# EAGLE board Tiva_Xbee (EAGLE 9.4.0)
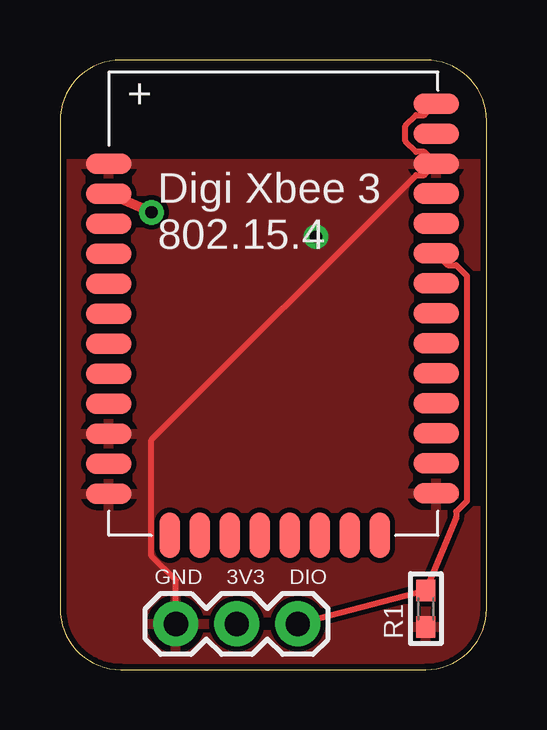
[diagram p0: board, top side]
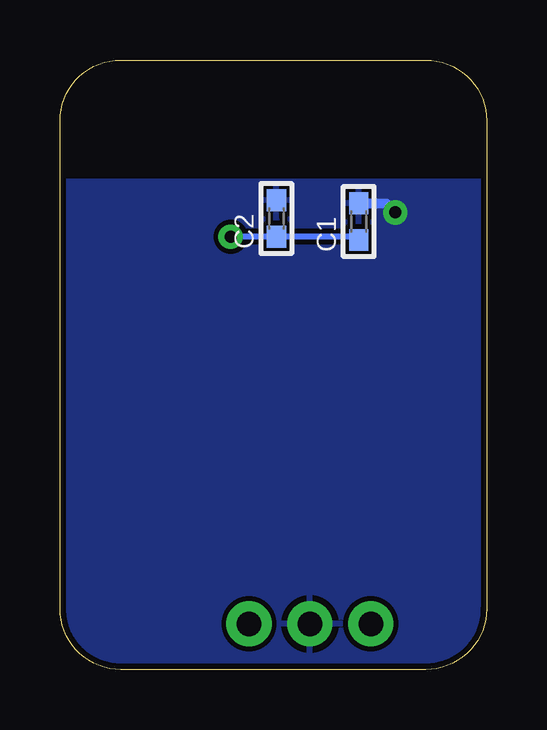
[diagram p1: board, bottom side, seen from below]

Size 17.78 x 25.4 mm. Coordinates in mm from the lower left corner, seen from the top.
Outline: 0,22.86 0,2.54 arc90 2.54,0 15.24,0 arc90 17.78,2.54 17.78,22.86 arc90 15.24,25.4 2.54,25.4 arc90 0,22.86
Copper layers (1*16): Top 0.035mm / dielectric 1.5mm / Bottom 0.035mm
Design rules "SparkFun": minimum track width 8mil, minimum drill 20mil, track to track 8mil, track to pad 8mil, pad to pad 8mil, via to via 8mil, smd to smd 8mil, copper to edge 10mil, drill to drill 8mil, minimum pad ring 12mil, minimum via ring 10mil, stop-mask expansion 4mil, vias tented up to drill 25mil, thermal gap 10mil

## Footprints (pad centres in the part's own frame; a part is rotated, then mirrored left to right if it is on the bottom)
_0603 = smd 0.9 x 0.8: 1 -0.762,0; 2 0.762,0
1X03 = drill 1.016 pad 1.88: 1 0,0; 2 2.54,0; 3 5.08,0
XBEE3_MICRO = smd 0.864 x 1.905: [RESERVED1] 0.681,-9.652; [RESERVED2] 1.93,-9.652; [RESERVED3] 3.18,-9.652; [RESERVED4] 4.43,-9.652; SPI_CLK/DIO18 -4.318,-9.652; SPI_MOSI/DIO15 -0.569,-9.652; SPI_MOSI/DIO16 -1.819,-9.652; SPI_SSEL/DIO17 -3.068,-9.652 | smd 1.905 x 0.864: [RESERVED5] 6.782,-6.65; AD0/DIO0 6.782,4.597; AD1/DIO1 6.782,3.348; AD2/DIO2 6.782,2.098; AD3/DIO3 6.782,0.848; ASSOCIATE/DIO5 6.782,-1.651; CTS/DIO7 6.782,-4.15; DIN/CONFIG/DIO14 -6.858,2.093; DIO4 6.782,-5.4; DIO12 -6.858,0.843; DOUT/DIO13 -6.858,3.343; DTR/SLEEP_RQ/DIO8 -6.858,-4.155; GND1 -6.858,5.842; GND2 -6.858,-5.405; GND3 -6.858,-7.904; GND4 6.782,-7.899; GND5 6.782,5.847; GND6 6.782,8.346; ON/SLEEP/DIO9 6.782,-2.901; PWM1/DIO11 -6.858,-2.906; RF 6.782,7.097; RSSI_PWM/DIO10 -6.858,-1.656; RST -6.858,-0.406; RTS/DIO6 6.782,-0.401; SPI_ATTN/BOOTMODE/DIO19 -6.858,-6.655; VCC -6.858,4.592

## Placement (x,y rotation side)
C1  9pF  [_0603]  5.33,18.67 90 bottom
C2  1uF  [_0603]  8.76,18.8 90 bottom
J1  [1X03]  9.91,1.91 180 top
R1  [_0603]  15.24,2.54 90 top
U$1  XBEE3_DIO  [XBEE3_MICRO]  8.89,15.24 0 top

## Library data of the parts
C1 C2 J1 R1 U$1 = CabelBot

## Nets
3.3V: C1.2 C2.2 J1.2 U$1.VCC
CTS: U$1.CTS/DIO7
DIN: U$1.DIN/CONFIG/DIO14
DIO2: J1.1 R1.2 U$1.AD2/DIO2
DOUT: U$1.DOUT/DIO13
DTR: U$1.DTR/SLEEP_RQ/DIO8
GND: C1.1 C2.1 J1.3 R1.1 U$1.GND1 U$1.GND2 U$1.GND3 U$1.GND4 U$1.GND5 U$1.GND6

## Tracks (layer width: path | path; a pad name or v marks a point on that pad's centre or on a via)
3.3V  (via drill 0.51)
  Top 0.406: v3.81,19.05 U$1.VCC
  Bottom 0.406: 5.46,19.56 C1.2 4.19,19.43 v3.81,19.05
  pour Bottom: 0,0 0,20.32 17.78,20.32 17.78,0
DIO2
  Top 0.254: J1.1 R1.2 16.51,6.35 16.51,6.58 16.95,7.03 16.95,16.4 16.51,16.85 16.16,16.85 U$1.AD2/DIO2
GND  (via drill 0.51)
  Top 0.254: U$1.GND6 15.18,23.1 14.84,23.1 14.39,22.65 14.39,22.02 14.84,21.57 15.18,21.57 U$1.GND5 15.18,20.6 14.84,20.6 3.81,9.57 3.81,4.75 4.83,3.74 J1.3
  Bottom 0.254: C1.1 5.46,18.03 C2.1 v10.67,18.03
  pour Top: 0,21.08 17.78,21.08 17.91,20.95 17.91,0.13 17.78,0 0,0

## Text on the board
tPlace: GND 3V3 DIO